# Altium PCB PowerBoard.PcbDoc
Units mil, origin at the board's own origin, x right, y up, seen from the top; angles counter-clockwise.
Board outline 5118.11 x 2755.91 mil, 2 copper layers (Top Layer, Bottom Layer); 6 components, 6 nets, 80 pads, 0 vias.
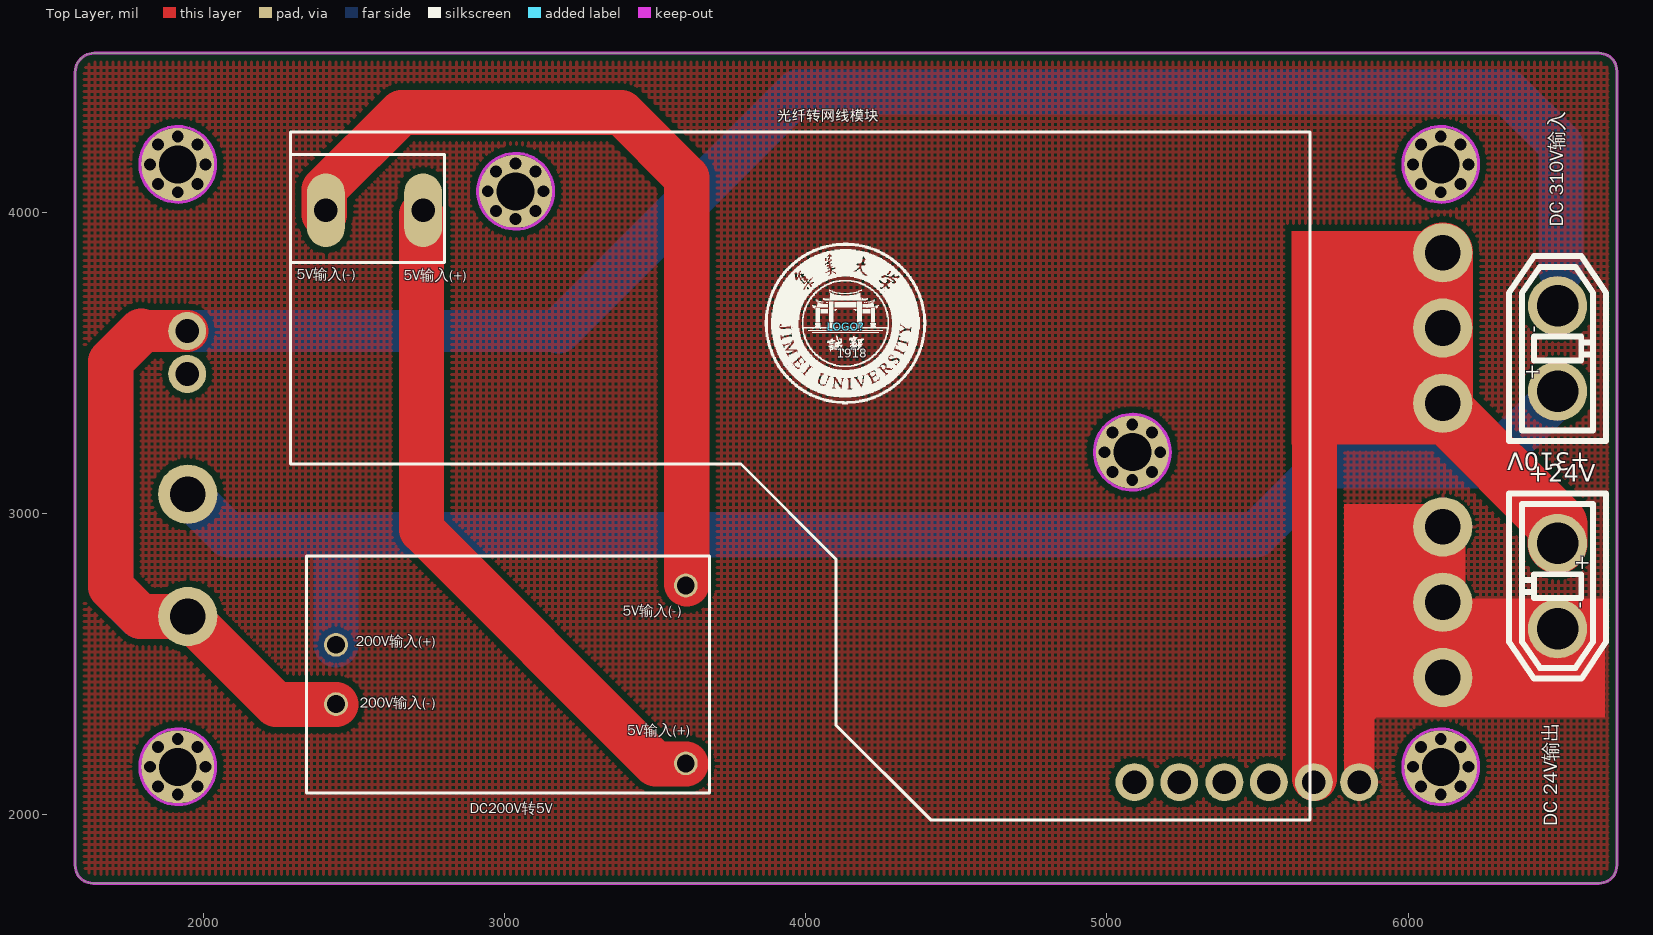
[diagram p0: Top Layer view]
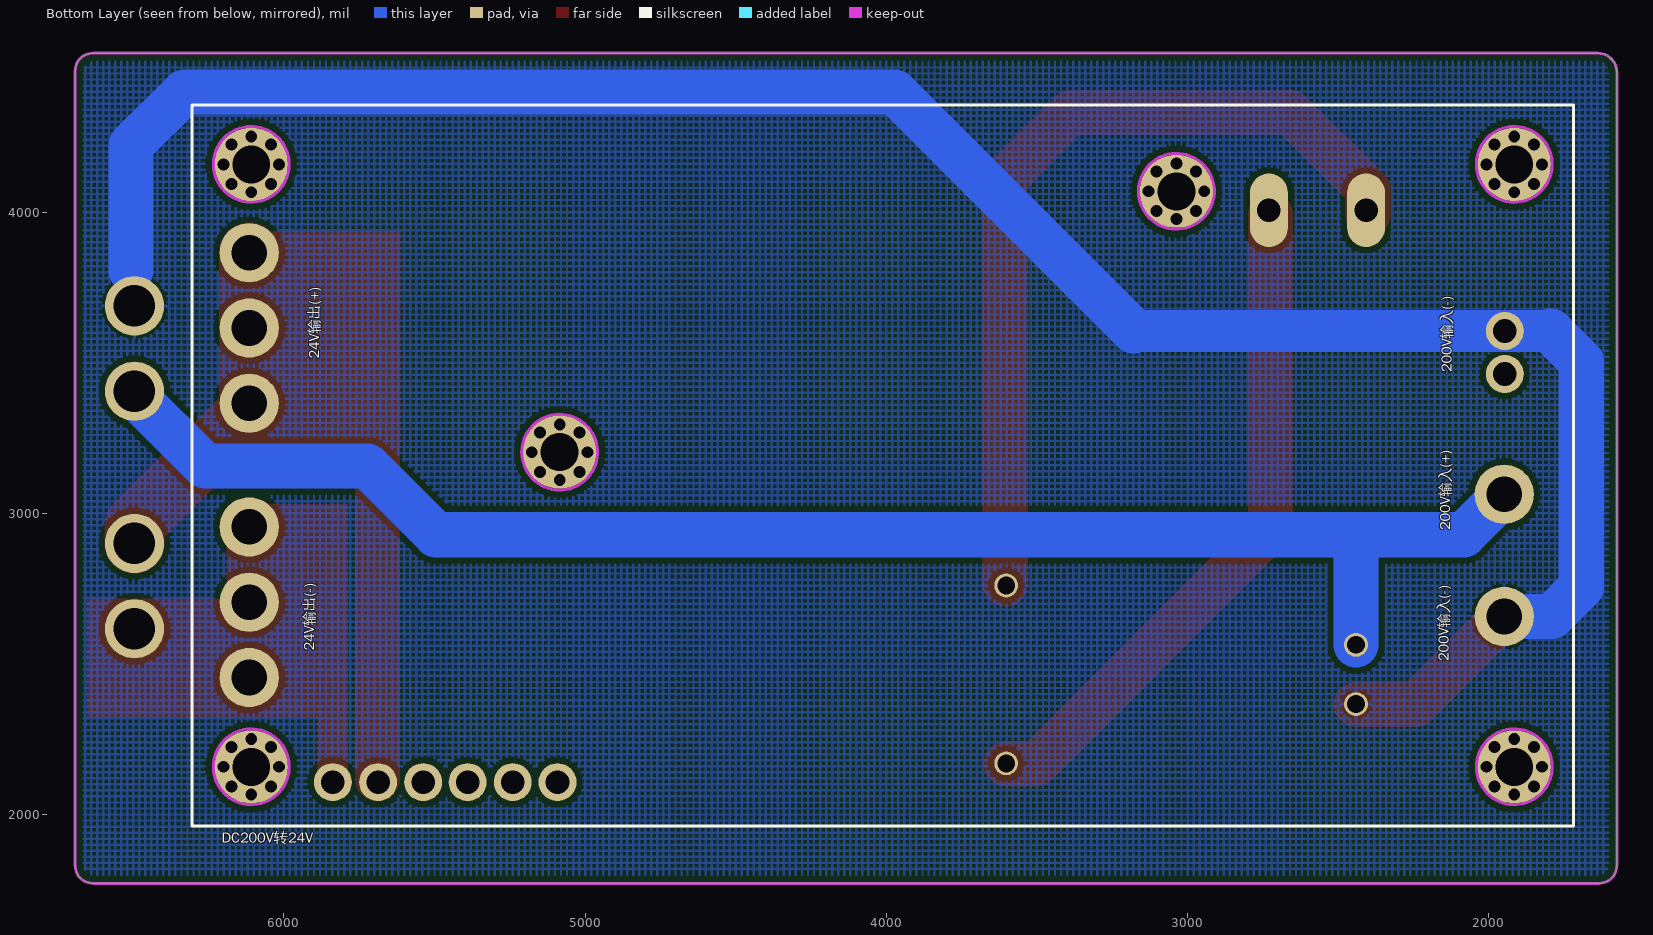
[diagram p1: Bottom Layer view, seen from below]

## Layer stack, top to bottom
Top Solder: solder mask 0.4, Solder Resist, Dk 3.5
Top Layer: signal copper 1.4
Dielectric 1: dielectric 12.6, FR-4, Dk 4.8
Bottom Layer: signal copper 1.4
Bottom Solder: solder mask 0.4, Solder Resist, Dk 3.5

## Board outline
1633.86,1771.65 cw(c1633.86,1830.71) 1574.8,1830.71 1574.8,4464.57 cw(c1637.8,4464.57) 1637.8,4527.56 6633.86,4527.56 cw(c6633.86,4468.5) 6692.91,4468.5 6692.91,1830.71 cw(c6633.86,1830.71) 6633.86,1771.65

## Design rules (kind name [scope] priority, off if disabled: settings)
Clearance [All] p1: gap=8
ComponentClearance [All] p1: gap=0 collisioncheckmode=3 verticalgap=0 showdistances=FALSE
PolygonConnect [All] p1: connectstyle=Relief reliefconductorwidth=10 reliefentries=4 polygonreliefangle="90 Angle" airgapwidth=10
RoutingVias [All] p1: holewidth=28 width=50 viastyle="Through Hole" minholewidth=28 minwidth=50 maxholewidth=28 maxwidth=50
SolderMaskExpansion [All] p1: expansion=4
Width [All] p1: maxlimit=500 minlimit=10 preferedwidth=80 minimp=50.000000 maximp=50.000000 favimp=50.000000
29 further rules are at their usual default settings.

## Classes and differential pairs
component class Sheet2: DC200Vת5V DC200Vת24V "DC 24V输出" "DC 310V输入"

## Components (designator, comment, footprint, x,y, rotation, side; value= is the part's Value field where it differs from the comment)
DC200V转5V "*5V稳压模块" DC—DC（200-5） 3051,2465 r0 top locked (schematic designator *U2)
DC200V转24V "24V稳压模块" DC-DC（400——24） 3903.54,3083.66 r0 bottom locked (schematic designator U?)
"DC 24V输出" "2PIN" XT60-F 6496.06,2919.27 r270 top (schematic designator 香蕉头2)
"DC 310V输入" "2PIN" XT60-F 6496.06,3385.83 r90 top (schematic designator 香蕉头1)
LOGO? "JMU_LOGO" JMU_LOGO(1.35cm) 4133.86,3620 r0 top
光纤转网线模块 "光纤转网线" 光纤转网线 3982,3754 r0 top locked (schematic designator *)

## Footprints (in the part's own frame and the unit in brackets; to place one, negate y for a bottom-side part, rotate by r counter-clockwise, add the part's x,y. Pads: shape width x height; smd on the part's side, far side on the other; paste and mask are expansions set on the pad)
DC-DC（400——24） [mm]
  round 6.2 hole 3.2: 0(-50.5,-27.3) 0(-50.5,23.5) 0(56,-27.3) 0(56,23.5)
  round 1 hole 1: 1(-52.85,-27.3) 1(-52.85,23.5) 1(-52.162,-28.962) 1(-52.162,-25.638) 1(-52.162,21.838) 1(-52.162,25.162) 1(-50.5,-29.65) 1(-50.5,-24.95) 1(-50.5,21.15) 1(-50.5,25.85) 1(-48.838,-28.962) 1(-48.838,-25.638) 1(-48.838,21.838) 1(-48.838,25.162) 1(-48.15,-27.3) 1(-48.15,23.5) 1(53.65,-27.3) 1(53.65,23.5) 1(54.338,-28.962) 1(54.338,-25.638) 1(54.338,21.838) 1(54.338,25.162) 1(56,-29.65) 1(56,-24.95) 1(56,21.15) 1(56,25.85) 1(57.662,-28.962) 1(57.662,-25.638) 1(57.662,21.838) 1(57.662,25.162) 1(58.35,-27.3) 1(58.35,23.5)
  round 5 hole 3: 2(56.175,9.625) 3(56.175,3.275) 4(56.175,-7.15) 5(56.175,-13.5) 6(56.175,-19.85) 9(-49.65,0.525) 10(-49.65,10.825) 17(56.175,15.975)
  round 3.2 hole 2: 7(-49.7,-13.25) 8(-49.7,-9.625) 11(30.175,24.8) 12(33.95,24.8) 13(37.75,24.8) 14(41.5,24.8) 15(45.3,24.8) 16(49.125,24.8)
  Keep-Out Layer circle w0.254: c-50.5,23.5 r3.2
  Keep-Out Layer circle w0.254: c-50.5,-27.3 r3.2
  Keep-Out Layer circle w0.254: c56,23.5 r3.2
  Keep-Out Layer circle w0.254: c56,-27.3 r3.2
  silkscreen extent -55.5,-32.3 61,28.5
DC—DC（200-5） [mm]
  round 2 hole 1.5: 1(14,7.5) 2(14,-7.5) 3(-15.5,-2.5) 4(-15.5,2.5)
  silkscreen extent -18,-10 16,10
JMU_LOGO(1.35cm) [mil]
  silkscreen extent -270,-256 266,278
XT60-F [mm]
  round 5 hole 3.5: 1(0.489,0) 2(7.689,0)
  silkscreen extent -3.71,-4.1 11.89,4.1, body extent -3.81,-4.06 12.09,4.09, height 16.5
光纤转网线 [mm]
  round 6.2 hole 3.2: 0(-24,8) 0(28,-14)
  round 1 hole 1: 1(-26.35,8) 1(-25.662,6.338) 1(-25.662,9.662) 1(-24,5.65) 1(-24,10.35) 1(-22.338,6.338) 1(-22.338,9.662) 1(-21.65,8) 1(25.65,-14) 1(26.338,-15.662) 1(26.338,-12.338) 1(28,-16.35) 1(28,-11.65) 1(29.662,-15.662) 1(29.662,-12.338) 1(30.35,-14)
  oval 3.2x6.2 hole 2: 2(-31.8,6.4) 3(-40,6.4)
  Keep-Out Layer circle w0.254: c28,-14 r3.2
  Keep-Out Layer circle w0.254: c-24,8 r3.2
  silkscreen extent -43,-45 43,13

## Part data
DC200V转5V: library part DC-DC（200—5）V
DC200V转24V: library part DC-DC（400——24）
"DC 24V输出" "DC 310V输入": library part 接线端子-2PIN
LOGO?: "LOGO"

## Nets (pads, with @x,y where several pads share a name; then routed paths per layer and width w, separated by ;. In a path a pad name is that pad's centre, name@x,y a point inside that pad or via, vN(x,y) a via of type N, cw(c..) or ccw(c..) an arc to the next point about the centre after c; other vN are vias at no path point)
"DC_5  NP": DC200V转5V.1 光纤转网线模块.3 | length 2831
  Top Layer w150: 光纤转网线模块.3@2401.57,3992.13 2401.57,4074.57 2658,4331 3388,4331 3605,4114 DC200V转5V.1@3605,2765
"DC_5  PP": DC200V转5V.2 光纤转网线模块.2 | length 2246.4
  Top Layer w150: 光纤转网线模块.2@2724.41,3992.13 2724.41,2945.59 3502,2168 DC200V转5V.2@3602.18,2168
"DC_24  NP": "DC 24V输出.2" DC200V转24V.2 DC200V转24V.3 DC200V转24V.16 DC200V转24V.17 | length 1460.6
  Top Layer w100: DC200V转24V.16 5837.6,2335.6 5943,2441 DC200V转24V.17@6101.43,2441
  Top Layer w150: DC200V转24V.17@6101.43,2441 DC200V转24V.17 DC200V转24V.2 DC200V转24V.3 ; 6125,2594 6498.46,2594 6521,2616.54
"DC_24  PP": "DC 24V输出.1" DC200V转24V.4 DC200V转24V.5 DC200V转24V.6 DC200V转24V.15 | length 3734.4
  Top Layer w10: DC200V转24V.15 5687.01,2932
  Top Layer w150: DC200V转24V.15@5689,2120 5689,3444.91 5837.09,3593 DC200V转24V.5@6058,3593
  Top Layer w180: DC200V转24V.4@6115.16,3333.66 DC200V转24V.4
  Top Layer w200: DC200V转24V.6 DC200V转24V.5 DC200V转24V.4 6115.16,3343.84 6496.06,2962.94 6496.06,2900
"DC_200  NP": "DC 310V输入.2" DC200V转5V.3 DC200V转24V.7 DC200V转24V.10 | length 8673.3
  Top Layer w140: 1794.29,3605.31 DC200V转24V.7
  Top Layer w150: 1794.29,3605.31 1692.91,3503.94 1692.91,2755.91 1791.34,2657.48 DC200V转24V.10 2241.3,2365 DC200V转5V.3@2440.76,2365
  Bottom Layer w140: 1794.29,3605.31 3179.31,3605.31
  Bottom Layer w150: 1794.29,3605.31 1692.91,3503.94 1692.91,2755.09 1790.52,2657.48 DC200V转24V.10 ; 3179.31,3605.31 3973,4399 6330,4399 6507,4222 6507,3805.73
"DC_200  PP": "DC 310V输入.1" DC200V转5V.4 DC200V转24V.9 | length 5176.9
  Bottom Layer w150: DC200V转24V.9 2082.81,2929 2444,2929 ; DC200V转5V.4 2440.76,2925.76 2444,2929 ; 6507,3403 6261,3157 5723,3157 5495,2929 2444,2929
pads on no net: DC200V转24V.0 DC200V转24V.1 DC200V转24V.8 DC200V转24V.11 DC200V转24V.12 DC200V转24V.13 DC200V转24V.14 光纤转网线模块.0 光纤转网线模块.1

## Polygon pours and split planes (outlines as drawn)
"DC_200  NP" on Bottom Layer "Bottom Layer-No Net" (hatched 90Degree grid 20 track 8, remove dead copper, pour order 12): 1574.8,4527.56 1574.8,1771.65 6732.28,1771.65 6732.28,4527.56 1574.8,4527.56
"DC_24  NP" on Top Layer "Top Layer-No Net" (hatched 90Degree grid 20 track 10, remove dead copper, pour order 20): 1327,4334 1327,4720 1386,4779 1466,4859 2504,4859 6742,4859 6892,4709 6972,4629 6972,2226 6972,1867 6748,1643 6646,1541 1793,1541 1681,1541 1322,1900

## Keep-outs
Keep-Out Layer:
  the board outline again, w10

## Other copper
Top Layer:
  rectangle net "DC_24  PP": 5613,3228.35 6181.1,3937.01
  rectangle net "DC_24  NP": 5787.4,2322.83 6181.1,3031.5
  rectangle net "DC_24  NP": 5984.25,2322.83 6653.54,2716.54

## Silkscreen, mask and mechanical layers (free items; w line width, h text height)
Top Overlay:
  text "5V输入(-)" at 2311,3765 h60
  text "5V输入(+)" at 2666,3762 h60
  text "+310V" at 6605,3221 h100 r180
  text "+24V" at 6399,3085 h100
  text "5V输入(-)" at 3393,2648 h60
  text "200V输入(+)" at 2506,2547 h60
  text "200V输入(-)" at 2519,2343 h60
  text "5V输入(+)" at 3408,2252 h60
Bottom Overlay:
  text "24V输出(+)" at 5871,3513 h60 r270
  text "200V输入(-)" at 2111,3469 h60 r270
  text "200V输入(+)" at 2117,2944 h60 r270
  text "24V输出(-)" at 5888,2544 h60 r270
  text "200V输入(-)" at 2121,2509 h60 r270
Top Solder:
  lines w200: 6121.16,3336.84 6527,2931
Bottom Solder:
  lines w140: 1794.29,3605.31 3179.31,3605.31
  lines w150: 1794.29,3605.31 1692.91,3503.94 1692.91,2755.91 1792.82,2656 1910.93,2656 1929.13,2637.8 ; 1948.82,3062.99 2081.81,2930 2460.63,2930 5501,2930 5731,3160 6268,3160 6507,3399 ; 3179.31,3605.31 3973,4399 6329,4399 6507,4221 6507,3805.73

## Text inside footprints (layer, text, board x,y; h text height)
"DC 24V输出": Top Overlay "-" at 6606.06,2683.27 h80 r90; Top Overlay "+" at 6616.06,2808.27 h80 r90
"DC 310V输入": Top Overlay "-" at 6386.06,3621.83 h80 r270; Top Overlay "+" at 6376.06,3496.83 h80 r270
LOGO?: Top Overlay "1918" at 4103.96,3506.18 h50